# Altium PCB UAC.PcbDoc
Units mm, origin at the board's own origin, x right, y up, seen from the top; angles counter-clockwise.
Board outline 27.3 x 35.43 mm, 2 copper layers (Top Layer, Bottom Layer), stack 1.57 mm thick; 37 components, 26 nets, 187 pads, 40 vias.
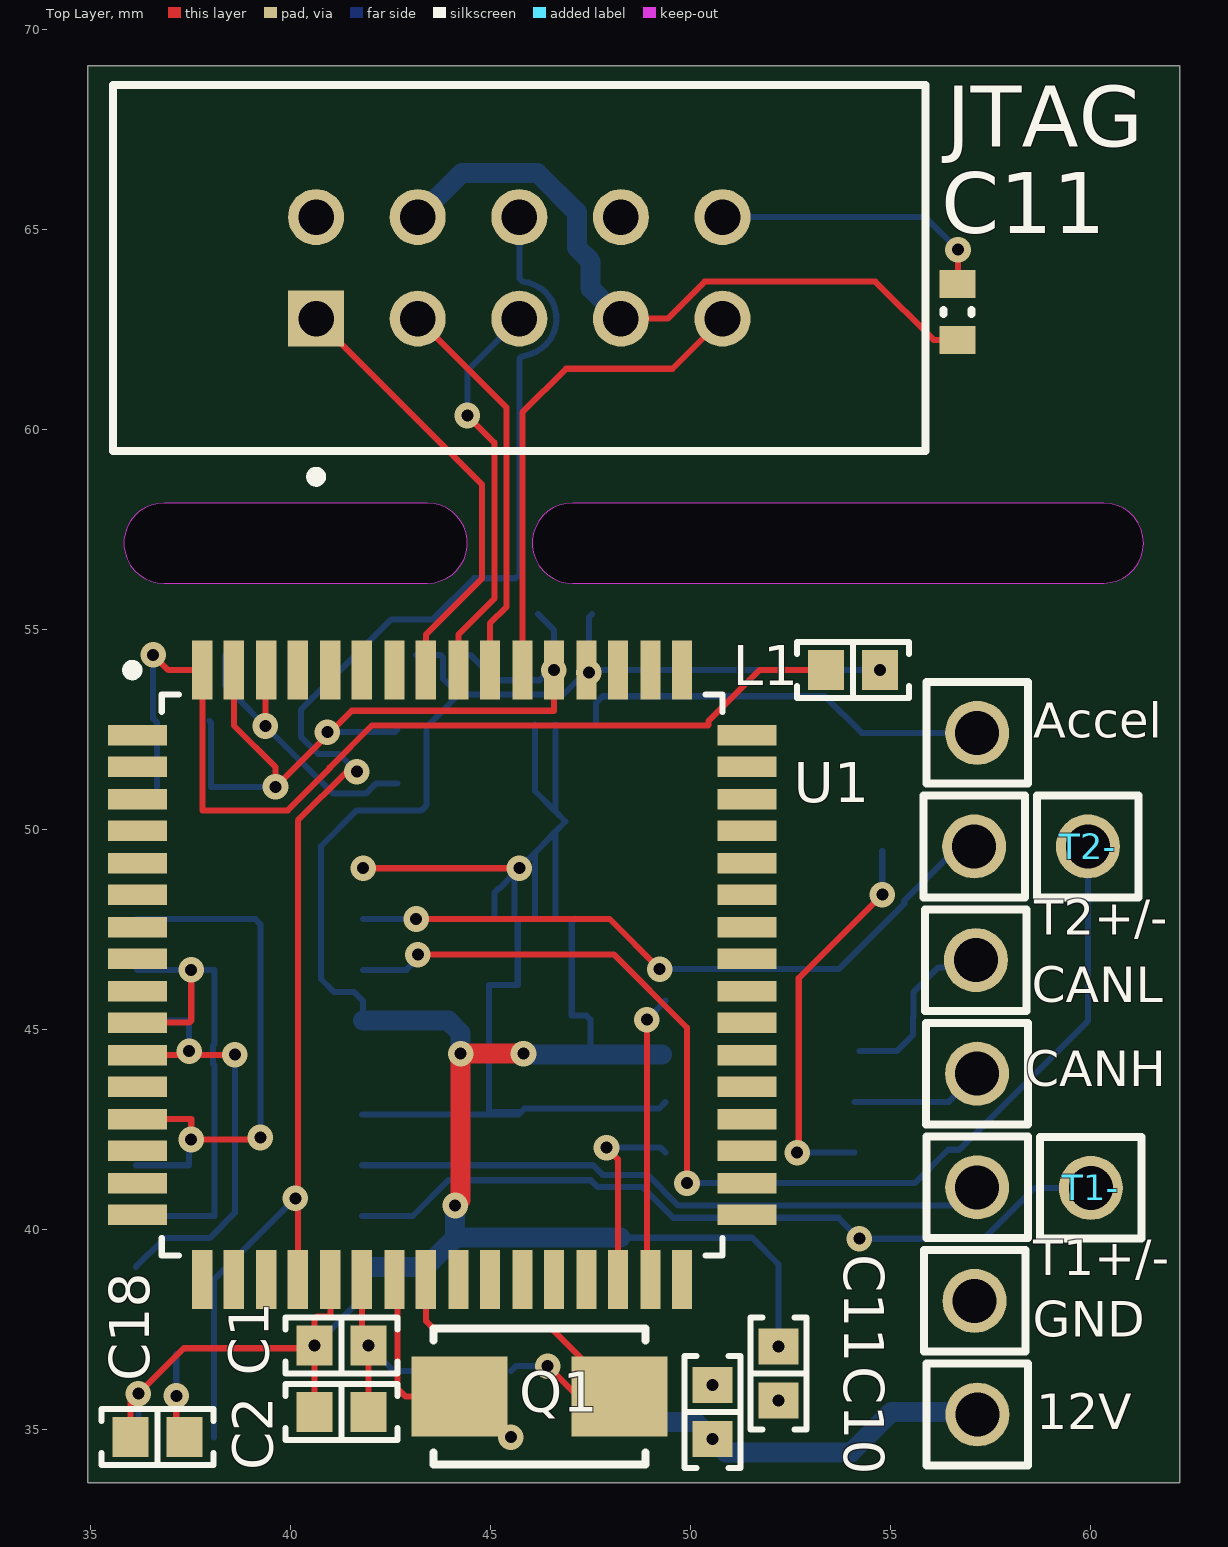
[diagram p0: Top Layer view]
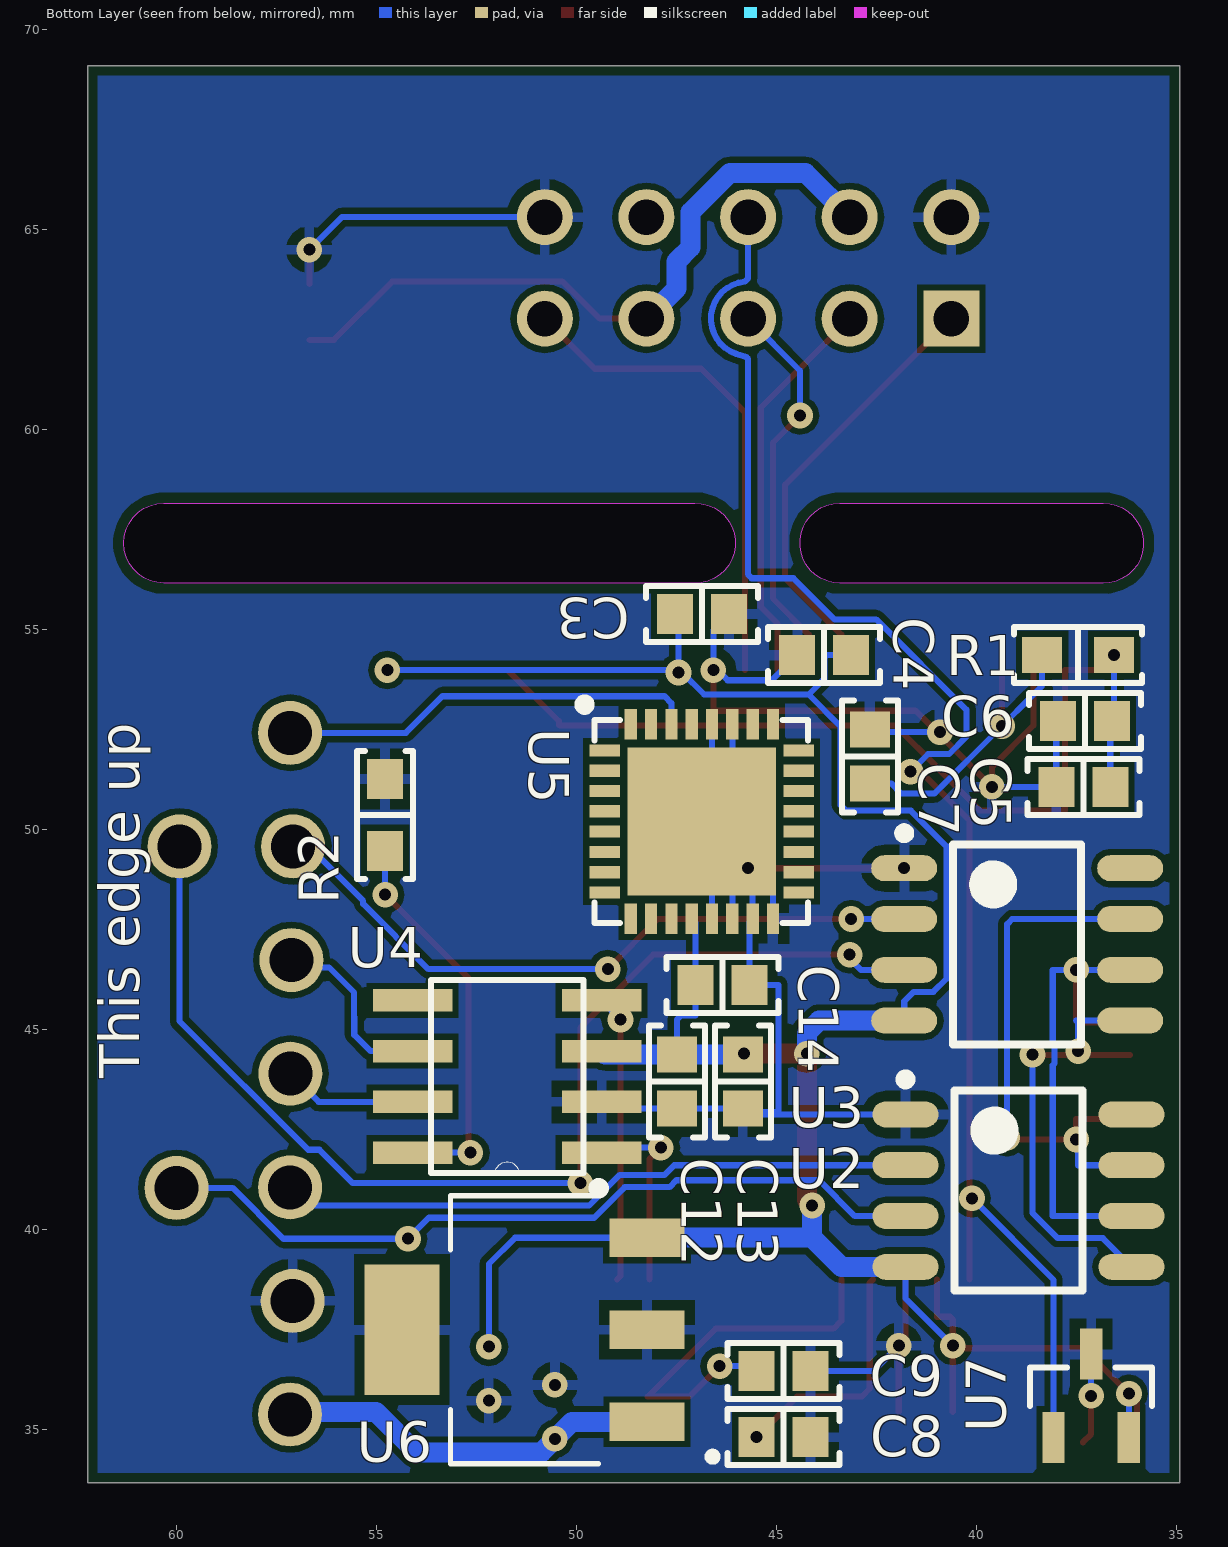
[diagram p1: Bottom Layer view, seen from below]

## Layer stack, top to bottom
Top Solder: solder mask 0.015, Solder Resist, Dk 3.5
Top Layer: signal copper 0.035
Dielectric 1: dielectric 1.5, FR-4, Dk 4.8
Bottom Layer: signal copper 0.035
Bottom Solder: solder mask 0.015, Solder Resist, Dk 3.5

## Board outline
34.925,33.655 34.925,69.088 62.23,69.088 62.23,33.655
cut-out: 36.838,56.15 43.422,56.15 ccw(c43.422,57.15) 43.422,58.15 36.842,58.15 ccw(c36.83,57.15)
cut-out: 47.049,56.15 60.325,56.15 ccw(c60.325,57.15) 60.325,58.15 52.246,58.151 47.049,58.152 ccw(c47.039,57.151)
cut-out: 0,0 0.254,0 0.254,0.254 0,0.254

## Design rules (kind name [scope] priority, off if disabled: settings)
AcuteAngle [All] p1: minimum=4.50000000000000E+0001 checktracksonly=FALSE
BoardOutlineClearance [All] p1: gap=0.254 ignorepadtopadclearanceinfootprint=FALSE
Clearance [All] p1: gap=0.152 ignorepadtopadclearanceinfootprint=FALSE
ComponentClearance [All] p1: gap=0.1 collisioncheckmode=3 verticalgap=0.254 showdistances=FALSE
FanoutControl Fanout_Small [All] p1 off: bgadir=Out bgaviamode=Centered fanoutstyle=Auto fanoutdirection=Alternating viagrid=0.025 // Protel DXP Scope 1 Expression Was: (CompPinCount < 5)   Fanout_Small (Default Rule)
FanoutControl Fanout_Default [All] p2: bgadir=Out bgaviamode=Centered fanoutstyle=Auto fanoutdirection=Alternating viagrid=0.025 // Fanout_Default (Default Rule)
FanoutControl Fanout_SOIC [All] p3 off: bgadir=Out bgaviamode=Centered fanoutstyle=Auto fanoutdirection=Alternating viagrid=0.025 // Protel DXP Scope 1 Expression Was: IsSOIC   Fanout_SOIC (Default Rule)
FanoutControl Fanout_BGA [All] p4 off: bgadir=Out bgaviamode=Centered fanoutstyle=Auto fanoutdirection=Alternating viagrid=0.025 // Protel DXP Scope 1 Expression Was: IsBGA   Fanout_BGA (Default Rule)
FanoutControl Fanout_LCC [All] p5 off: bgadir=Out bgaviamode=Centered fanoutstyle=Auto fanoutdirection=Alternating viagrid=0.025 // Protel DXP Scope 1 Expression Was: IsLCC   Fanout_LCC (Default Rule)
HoleSize [All] p1: absolutevalues=TRUE maxlimit=7 minlimit=0.2 maxpercent=80.000 minpercent=20.000
MinimumAnnularRing [All] p1: minimumring=0.17
PolygonConnect [All] p1: connectstyle=Relief reliefconductorwidth=0.254 reliefentries=4 polygonreliefangle="90 Angle" airgapwidth=0.254
RoutingVias [All] p1: holewidth=0.3 width=0.64 viastyle="Through Hole" minholewidth=0.3 minwidth=0.61 maxholewidth=0.711 maxwidth=1.27
SMDEntry [All] p1 off: side=TRUE corner=TRUE anyangle=FALSE // Protel DXP Scope 1 Expression Was: not IsRoundPad
SMDToCorner [All] p1: distance=60000
SilkToSolderMaskClearance [All] p1 off: minsilkscreentomaskgap=0.254 clearancetoexposedcopper=TRUE // Protel DXP Scope 1 Expression Was: IsPad
SolderMaskExpansion [All] p1: expansion=0 istentingtop=FALSE
Width [All] p1: maxlimit=1.219 minlimit=0.152 preferedwidth=0.305
22 further rules are at their usual default settings.

## Components (designator, comment, footprint, x,y, rotation, side; value= is the part's Value field where it differs from the comment)
12V "61300111121" 61300111121 57.169,35.365 r0 top
Accel "61300111121" 61300111121 57.165,52.406 r90 top
C1 "SMD Capacitor" "CAP 0603/1608" 41.275,37.084 r180 top value=1uF
C2 "SMD Capacitor" "CAP 0603/1608" 41.275,35.433 r180 top value=100nF
C3 "SMD Capacitor" "CAP 0603/1608" 46.865,55.375 r0 bottom value=1uF
C4 "SMD Capacitor" "CAP 0603/1608" 43.815,54.355 r180 bottom value=100nF
C5 "SMD Capacitor" "CAP 0603/1608" 37.338,51.054 r0 bottom value=1uF
C6 "SMD Capacitor" "CAP 0603/1608" 37.298,52.704 r0 bottom value=100nF
C7 "SMD Capacitor" "CAP 0603/1608" 42.672,51.816 r90 bottom value=1uF
C8 "SMD Capacitor" "CAP 0603/1608" 44.831,34.798 r0 bottom value=18pF
C9 "SMD Capacitor" "CAP 0603/1608" 44.831,36.449 r0 bottom value=18pF
C10 "SMD Capacitor" "CAP 0603/1608" 50.546,35.433 r270 top value=2u2
C11 "100nF 0603" CAPC0603(1608)100_L 56.678,62.93 r90 top value=100nF (schematic designator C?)
C11 "SMD Capacitor" "CAP 0603/1608" 52.197,36.384 r90 top value=1uF
C12 "SMD Capacitor" "CAP 0603/1608" 47.498,43.688 r90 bottom value=100nF
C13 "SMD Capacitor" "CAP 0603/1608" 45.847,43.688 r90 bottom value=1uF
C14 "SMD Capacitor" "CAP 0603/1608" 46.355,46.101 r180 bottom value=1uF
C18 "SMD Capacitor" "CAP 0603/1608" 36.679,34.799 r0 top value=1uF
CANH "61300111121" 61300111121 57.161,43.885 r90 top
CANL "61300111121" 61300111121 57.133,46.726 r90 top
GND "61300111121" 61300111121 57.101,38.205 r0 top
JTAG "5103309-1" TECO-5103309-1_V 45.718,64.03 r180 top (schematic designator JTAG?)
L1 "SMD Capacitor" "CAP 0603/1608" 54.062,53.975 r0 top value=100nH
Q1 "16M" "NDK NX5032GA" 46.228,35.814 r180 top
R1 "SMD Resistor" "STACKPOLE CSR0603" 37.465,54.355 r180 bottom value=100
R2 "SMD Resistor" "STACKPOLE CSR0603" 54.793,50.354 r270 bottom value=10k
T1+/- "61300111121" 61300111121 57.165,41.045 r0 top (schematic designator T1+)
T1- "61300111121" 61300111121 60.006,41.029 r0 top
T2+/- "61300111121" 61300111121 57.091,49.566 r0 top (schematic designator T2+)
T2- "61300111121" 61300111121 59.932,49.566 r0 top
U1 "AT90CAN128-16AI" *QFP80P1600X1600X120-64N 43.79,46.355 r0 top
U2 "MAX31855KASA+" SOIC8 38.958,40.962 r180 bottom value=Value
U3 "MAX31855KASA+" SOIC8 38.989,47.117 r180 bottom value=Value
U4 "MCP2551-I/SN" *SOIC127P600X175-8N 51.74,43.815 r0 bottom
U5 "ADXL1001/2" PCBComponent_1 49.299,51.968 r180 bottom
U6 "LT1118CST-5" *SOT230P700X180-4N 51.308,37.484 r0 bottom
U7 "MCP130T-450I/TT" *SOT95P237X112-3N 37.142,35.833 r180 bottom

## Footprints (in the part's own frame and the unit in brackets; to place one, negate y for a bottom-side part, rotate by r counter-clockwise, add the part's x,y. Pads: shape width x height; smd on the part's side, far side on the other; paste and mask are expansions set on the pad)
61300111121 [mm] "1pins, 1 row, straight, gold plating"
  round 1.6 hole 1.1: 1(0,0)
  silkscreen extent -1.27,-1.27 1.27,1.27, body extent -1.27,-1.27 1.27,1.27, height 8.57
*QFP80P1600X1600X120-64N [mil]
  rect 58x20 smd: 1(-300,236) 2(-300,205) 3(-300,173) 4(-300,142) 5(-300,110) 6(-300,79) 7(-300,47) 8(-300,16) 9(-300,-16) 10(-300,-47) 11(-300,-79) 12(-300,-110) 13(-300,-142) 14(-300,-173) 15(-300,-205) 16(-300,-236) 33(300,-236) 34(300,-205) 35(300,-173) 36(300,-142) 37(300,-110) 38(300,-79) 39(300,-47) 40(300,-16) 41(300,16) 42(300,47) 43(300,79) 44(300,110) 45(300,142) 46(300,173) 47(300,205) 48(300,236)
  rect 20x58 smd: 17(-236,-300) 18(-205,-300) 19(-173,-300) 20(-142,-300) 21(-110,-300) 22(-79,-300) 23(-47,-300) 24(-16,-300) 25(16,-300) 26(47,-300) 27(79,-300) 28(110,-300) 29(142,-300) 30(173,-300) 31(205,-300) 32(236,-300) 49(236,300) 50(205,300) 51(173,300) 52(142,300) 53(110,300) 54(79,300) 55(47,300) 56(16,300) 57(-16,300) 58(-47,300) 59(-79,300) 60(-110,300) 61(-142,300) 62(-173,300) 63(-205,300) 64(-236,300)
  silkscreen extent -310,-276 276,305, body extent -270,-270 270,270, height 30
*SOIC127P600X175-8N [mil]
  rect 78x22 smd: 1(-93,75) 2(-93,25) 3(-93,-25) 4(-93,-75) 5(93,-75) 6(93,-25) 7(93,25) 8(93,75)
  silkscreen extent -95,-95 75,115, body extent -75,-95 75,95, height 80
*SOT95P237X112-3N [mil]
  rect 22x50 smd: 1(-37,-41) 2(37,-41) 3(0,41)
  silkscreen extent -60,-10 60,28, body extent -60,-25 60,25, height 50
*SOT230P700X180-4N [mm]
  rect 1.88x0.96 smd: 1(-3.065,2.3) 2(-3.065,0) 3(-3.065,-2.3)
  rect 1.88x3.26 smd: 2(3.065,0)
  silkscreen extent -4.8,-3.35 1.85,3.35, body extent -1.91,-3.43 1.91,3.43, height 1.27
"CAP 0603/1608" [mm] "Chip Capacitor, 2-Leads, Body 1.60x0.80mm, IPC Medium Density"
  rect 0.9x1 smd: 1(-0.675,0) 2(0.675,0)
  silkscreen extent -1.4,-0.7 1.4,0.7, body extent -0.8,-0.41 0.8,0.41, height 0.82
CAPC0603(1608)100_L [mm] "Chip Capacitor, Body 1.6x0.8mm, Height 1.0mm, IPC High Density"
  rect 0.7x0.9 smd: 1(-0.7,0) 2(0.7,0)
  silkscreen extent -0.05,-0.35 0.05,0.35, body extent -0.87,-0.47 0.88,0.48, height 1
"NDK NX5032GA" [mm] "Crystal, 2-Leads, Body 5.00x3.20mm, IPC Medium Density"
  rect 2.4x2 smd: 1(-2,0) 2(2,0)
  silkscreen extent -2.65,-1.7 2.65,1.7, body extent -2.5,-1.6 2.5,1.6, height 1.2
PCBComponent_1 [mil]
  rect 30x12 smd: 1(0,0) 2(0,-20) 3(0,-40) 4(0,-60) 5(0,-80) 6(0,-100) 7(0,-120) 8(0,-140) 17(191,-140) 18(191,-120) 19(191,-100) 20(191,-80) 21(191,-60) 22(191,-40) 23(191,-20) 24(191,0)
  rect 12x30 smd: 9(25.5,-165.5) 10(45.5,-165.5) 11(65.5,-165.5) 12(85.5,-165.5) 13(105.5,-165.5) 13(105.5,25.5) 13(125.5,-165.5) 13(125.5,25.5) 15(145.5,-165.5) 16(165.5,-165.5) 25(165.5,25.5) 26(145.5,25.5) 29(85.5,25.5) 30(65.5,25.5) 31(45.5,25.5) 32(25.5,25.5)
  rect 146x146 smd: 13(95.5,-70)
  silkscreen extent -25,-170 200,50, body extent -10,-167 198,35, height 10
SOIC8 [mm] "SOIC, 8-Leads, Body 4,90x3,90mm, Pitch 1,27mm, IPC Low Density"
  oval 1.65x0.65 smd: 1(-2.825,1.905) 2(-2.825,0.635) 3(-2.825,-0.635) 4(-2.825,-1.905) 5(2.825,-1.905) 6(2.825,-0.635) 7(2.825,0.635) 8(2.825,1.905)
  silkscreen extent -2.95,-2.5 1.6,2.9, body extent -3,-2.5 3,2.5, height 1.75
"STACKPOLE CSR0603" [mm] "Chip Resistor, 2-Leads, Body 1.60x0.80mm, IPC Medium Density"
  rect 1x0.9 smd: 1(-0.9,0) 2(0.9,0)
  silkscreen extent -1.6,-0.7 1.6,0.7, body extent -0.85,-0.4 0.85,0.4, height 0.45
TECO-5103309-1_V [mm] "Male Header, 10-Leads, Body 20.32x9.144mm, Pitch 2.54mm"
  rect 1.4x1.4 hole 0.889: 1(5.08,1.27)
  round 1.4 hole 0.889: 2(5.08,-1.27) 3(2.54,1.27) 4(2.54,-1.27) 5(0,1.27) 6(0,-1.27) 7(-2.54,1.27) 8(-2.54,-1.27) 9(-5.08,1.27) 10(-5.08,-1.27)
  silkscreen extent -10.16,-4.57 10.16,5.35, body extent -10.16,-4.57 10.16,4.57, height 9.85

## Part data
12V Accel CANH CANL GND T1+/- T1- T2+/- T2-: "WR-PHD 2.54 mm THT Pin Header, 1p", Rated Current="3 A", Withstanding Voltage="500 VAC", Working Voltage="250 VAC", ComponentLink1Description=Manufacturer, ComponentLink1URL=http://www.we-online.de, ComponentLink2Description=Datasheet, ComponentLink2URL=http://katalog.we-online.de/em/datasheet/6130xx11121.pdf, Part Number=61300111121, Pin Number=1, Pitch="2.54 mm", Published Date="Aug 2017", Publisher="Wurth Elektronik"
C1 C2 C3 C4 C5 C6 C7 C8 C9 C10 C11 C12 C13 C14 C18 L1: "Capacitor with multiple Footprints"
C11: library part CMP-1035-02579-1, "CAP 100nF 10V ±5% 0603 (1608 Metric) Thickness 1mm SMD", Case-EIA=0603, Case-Metric=1608, Rated Voltage="10 V", Tolerance=Â±5%, Max Thickness="1 mm", Technology=SMT
JTAG: library part CMP-2000-07502-1, "Male Header, Pitch 2.54 mm, 2 x 5 Position, Height 9.855 mm, Tail Length 3.048 mm, -65 to 105 degC, RoHS, Tube", Colour=Black, Current Rating=1A, Flammability Rating=UL94V-0, Insulation Resistance=5GR, Manufacturer="TE Connectivity", Max Operating Temperature=105degC, Min Operating Temperature=-65degC, Package Description="Male Header, Pitch 2.54 mm, 2 x 5 Position, Height 9.855 mm, Tail Length 3.048 mm", Package Quantity=35, Board Standoff=Yes(With), Body Material=Thermoplastic, Connector System=Wire-to-Board, Connector Type=Header, Contact Gender=Male, Contact Material=CopperAlloy, Contact Mating Length=0.24inch, Contact Plating=Gold, Contact Shape=Square, Datasheet URL=http://www.te.com/commerce/DocumentDelivery/DDEController?Action=showdoc&DocId=Customer+Drawing%7F5103309%7FE1%7Fpdf%7FEnglish%7FENG_CD_5103309_E1.pdf%7F5103309-1, Datasheet Version="Rev. E1, 03/2011", Depth=9.14mm, ELV=Compliant, Gender=Male, Height=8.813mm, Housing Colour=Black, Housing Material=PBT, Lead Free=LeadFree, Length=0.8inch, Manufacturer URL=http://www.te.com/, Mating Alignment=Yes(With), Mating Connector Lock=No(Without), Mating Retention=No(Without), Max Current Rating=1A, Mount=ThroughHole, Mounting Technology=ThroughHole, Number of Contacts=10, Number of Positions=10, Number of Rows=2, Orientation=Straight, Package Reference=5103309-1, Packaging=Rail/Tube, Panel Mount Retention=No(Without), PCB Mount Alignment=No(Without), PCB Mount Retention=Without, PCB Mounting Orientation=Vertical, Pitch=2.54mm, REACH SVHC=NoSVHC, RoHSCompliant=True, Row Spacing=2.54mm, Shrouded=Yes(With), Shrouded End Dimension=3.81mm, Termination=ThroughHole, Termination Post Length=0.12inch
Q1: library part "16 MHz Quartz", "16 MHz Quartz"
R1 R2: "Resistor with multiple footprints"
U1: "Ic Mcu 8bit 128kb Flash 64tqfp", Package="TQFP-64 Microchip", Availability=Unavailable, MF=Microchip, MP=AT90CAN128-16AI, Price=None, SnapEDA_Link=https://www.snapeda.com/parts/AT90CAN128-16AI/Microchip/view-part/?ref=snap
U2 U3: "No Description Available", Built_By=EMA_UL_Team, Copyright="Copyright (C) 2018 Accelerated Designs. All rights reserved", Manufacturer_Part_Number=MAX31855KASA+, RefDes=RefDes, Type=DEV, Vendor="Maxim Integrated Products"
U4: "MCP2551 Series 5.5 V 1 Mb/s Surface Mount High-Speed CAN Transceiver - SOIC-8", Package="SOIC-8 Microchip", Availability=Unavailable, MF=Microchip, MP=MCP2551-I/SN, Price=None, SnapEDA_Link=https://www.snapeda.com/parts/MCP2551-I/SN/Microchip/view-part/?ref=snap
U6: "or UA78M if used topdown (in and out changed)"
U7: "System Supervisors - Power Supply Monitors with Reset Generators Open Drain Low", Package="SOT-23-3 Microchip", Availability=Unavailable, MF=Microchip, MP=MCP120T-450I/TT, Price=None, SnapEDA_Link=https://www.snapeda.com/parts/MCP120T-450I/TT/Microchip/view-part/?ref=snap

## Via types
v1: diameter 0.64, hole 0.3, Top Layer to Bottom Layer, 40 vias

## Nets (pads, with @x,y where several pads share a name; then routed paths per layer and width w, separated by ;. In a path a pad name is that pad's centre, name@x,y a point inside that pad or via, vN(x,y) a via of type N, cw(c..) or ccw(c..) an arc to the next point about the centre after c; other vN are vias at no path point)
+5V: C1.2 C2.2 C3.2 C4.2 C11.2@52.197,37.059 C12.2 C13.2 C14.1 C18.1 L1.2 U1.21 U1.52 U2.4 U3.4 U4.3 U5.12 U6.3 U7.2 | length 68.6
  Top Layer w0.152: C18.1@35.997,34.671 35.997,35.686 v1(36.195,35.884) 37.332,37.021 40.537,37.021 v1(40.6,37.084) ; C2.2 v1(40.6,37.084) ; U1.21 40.996,37.809 40.665,37.809 40.6,37.744 v1(40.6,37.084) ; U1.52 v1(47.457,53.914)
  Top Layer w0.5: v1(44.113,40.589) 44.25,40.726 v1(44.25,44.387) v1(45.823,44.387)
  Bottom Layer w0.152: v1(36.195,35.884) 36.195,34.799 U7.2 ; v1(40.6,37.084) 41.783,38.267 U2.4 ; U3.4 41.814,45.696 41.581,45.928 41.085,45.928 40.76,46.253 40.76,49.576 41.647,50.462 43.267,50.462 43.401,50.596 43.401,52.56 44.206,53.365 ; C4.2 43.742,54.354 43.811,54.286 43.811,53.76 44.206,53.365 ; v1(45.823,44.387) C13.2 ; U5.12 47.03,47.668 C14.1 47.03,45.339 47.396,45.339 47.498,45.237 C12.2 ; C3.2 47.457,55.292 v1@47.457,53.959 ; U6.3 51.54,39.784 52.197,39.127 v1(52.197,37.059) ; U4.3@49.291,44.363 U4.3 ; v1(54.737,53.975) 47.474,53.975 v1@47.457,53.959 ; 44.206,53.365 46.813,53.365 47.362,53.914 v1(47.457,53.914) v1@47.457,53.959
  Bottom Layer w0.5: U2.4 43.386,39.057 44.113,39.784 ; U3.4 43.942,45.212 44.25,44.904 v1(44.25,44.387) ; v1(44.113,40.589) 44.113,39.784 ; C13.2 C12.2 ; C12.2 U4.3@49.291,44.363 ; U6.3 44.113,39.784
+12V: 12V.1 C10.2 U6.1 | length 9.7
  Bottom Layer w0.152: U6.1 U6.1@48.248,35.179
  Bottom Layer w0.5: U6.1@48.248,35.179 50.125,35.179 v1(50.546,34.758) 50.887,34.417 54.008,34.417 55.024,35.433 57.101,35.433 12V.1
GND: C1.1 C2.1 C3.1 C4.1 C5.2 C6.2 C7.2 C8.1 C9.1 C10.1 C11.1@52.197,35.709 C11.2@56.678,63.63 C12.1 C13.1 C14.2 C18.2 GND.1 JTAG.2 JTAG.10 R2.1 U1.22 U1.53 U1.63 U2.1 U3.1 U4.2 U5.13 U5.15 U5.16 U6.2 U7.3 | length 67.4
  Top Layer w0.152: v1(37.142,35.833) 37.142,34.876 C18.2@37.347,34.671 ; U1.63 38.583,52.59 39.624,51.548 v1(39.624,51.054) 41.529,52.959 46.584,52.959 v1(46.584,53.975) ; U1.22 41.783,37.251 v1(41.95,37.084) C2.1 ; v1(41.814,49.022) v1(45.72,49.022) ; C11.2@56.678,63.63 56.686,63.637 v1(56.686,64.487)
  Bottom Layer w0.152: v1(37.142,35.833) U7.3 ; C6.2 38.013,52.664 C5.2 v1(39.624,51.054) ; v1(40.919,52.426) 42.607,52.426 C7.2 ; U2.1 45.701,42.867 C13.1@45.76,42.926 ; v1(41.95,37.084) 42.585,36.449 C9.1 ; C4.1 45.123,53.721 46.228,53.721 46.482,53.975 v1(46.584,53.975) 46.584,54.982 C3.1 ; U5.16 45.095,48.412 45.197,48.514 45.212,48.514 U5.13@45.603,48.905 ; U5.15 U5.13@45.603,48.905 ; U5.15@45.68,47.694 C14.2 44.958,46.101 44.958,42.926 C13.1@45.76,42.926 ; U5.13@46.111,47.765 U5.13@46.111,49.413 ; U5.13@46.111,52.616 46.111,50.952 U5.13@46.619,50.444 ; U5.13@46.619,47.765 U5.13@46.619,49.936 ; U5.13@46.619,52.616 U5.13@46.619,50.444 ; U4.2 49.211,43.013 C12.1 C13.1 C13.1@45.76,42.926 ; JTAG.10 55.872,65.3 v1(56.686,64.487) ; U5.13@45.603,48.905 v1(45.72,49.022) U5.13@46.111,49.413 ; U5.13@46.111,49.413 46.482,49.784 46.474,49.792 U5.13@46.619,49.936 ; U5.13@46.619,49.936 46.873,50.19 U5.13@46.619,50.444
  other v1: 52.197,35.709 50.546,36.108
NetAccel_1: Accel.1 U5.30 | length 10.5
  Bottom Layer w0.152: U5.30 47.635,53.149 47.806,53.321 53.359,53.321 54.274,52.406 Accel.1
NetC7_1: C7.1 R1.1 U1.62 | length 7.7
  Top Layer w0.152: v1(39.37,52.578) 39.37,53.95 U1.62
  Bottom Layer w0.152: R1.1 38.365,53.586 38.652,53.299 38.652,53.296 v1(39.37,52.578) 41.062,50.886 41.883,50.886 42.138,51.141 C7.1
NetC8_2: C8.2 Q1.2 U1.23 | length 6.1
  Top Layer w0.152: U1.23 42.675,38.656 42.675,36.015 42.876,35.814 Q1.2 44.49,35.814 v1(45.506,34.798) v1@45.536,34.768
NetC9_2: C9.2 Q1.1 U1.24 | length 9.7
  Top Layer w0.152: U1.24 43.383,37.708 43.577,37.514 46.528,37.514 Q1.1 47.19,35.814 v1(46.428,36.576)
  Bottom Layer w0.152: C9.2 45.633,36.576 v1(46.428,36.576)
NetCANH_1: CANH.1 U4.7 | length 3.4
  Bottom Layer w0.152: U4.7 56.456,43.18 CANH.1
NetCANL_1: CANL.1 U4.6 | length 4.5
  Bottom Layer w0.152: U4.6@54.221,44.45 55.156,44.45 55.563,44.857 55.563,45.295 55.569,45.301 55.569,45.917 56.194,46.542 56.95,46.542 CANL.1
NetJTAG?_1: JTAG.1 U1.57 | length 11.1
  Top Layer w0.152: JTAG.1 44.79,58.608 44.79,56.271 43.383,54.864 U1.57
NetJTAG?_3: JTAG.3 U1.55 | length 9.9
  Top Layer w0.152: JTAG.3 45.4,60.539 45.4,55.56 44.983,55.143 U1.55
NetJTAG?_5: JTAG.5 U1.56 | length 10
  Top Layer w0.152: U1.56 44.196,54.864 45.095,55.763 45.095,59.664 v1(44.42,60.339)
  Bottom Layer w0.152: v1(44.42,60.339) 44.42,61.462 JTAG.5
NetJTAG?_6: JTAG.6 U1.20 U7.1 | length 39.5
  Top Layer w0.152: v1(40.118,40.767) v1@40.183,40.767 ; U1.20 v1@40.183,40.767 ; v1(41.656,51.435) 41.402,51.435 40.183,50.216 v1@40.183,40.767
  Bottom Layer w0.152: U7.1 38.082,38.73 v1(40.118,40.767) ; v1(41.656,51.435) 41.214,51.877 40.692,51.877 40.259,52.31 40.259,52.986 42.518,55.245 43.558,55.245 44.585,56.272 45.629,56.272 45.718,56.361 45.718,61.753 45.762,61.798 cw(c45.87,61.69) 45.763,61.799 46.005,61.877 ccw(c45.718,62.76) 45.8,63.685 45.718,63.767 JTAG.6
NetJTAG?_9: JTAG.9 U1.54 | length 12.4
  Top Layer w0.152: U1.54 45.796,60.417 46.889,61.51 49.548,61.51 JTAG.9
NetR2_2: R2.2 U4.8 | length 10.3
  Top Layer w0.152: v1(52.662,41.91) 52.705,41.953 52.705,46.274 v1(54.793,48.362)
  Bottom Layer w0.152: v1(52.662,41.91) U4.8 ; 54.793,48.802 v1(54.793,48.362) R2.2
NetT1+_1: T1+/-.1 U2.2 | length 16
  Bottom Layer w0.152: U2.2 47.562,41.597 47.803,41.356 48.927,41.356 49.694,40.589 56.709,40.589 T1+/-.1
NetT1-_1: T1-.1 U2.3 | length 19.7
  Bottom Layer w0.152: U2.3 43.048,40.327 43.942,41.22 47.508,41.22 47.677,41.051 48.801,41.051 49.568,40.284 53.696,40.284 v1(54.221,39.759) 57.334,39.759 58.604,41.029 T1-.1
NetT2+_1: T2+/-.1 U3.2 | length 17.1
  Top Layer w0.152: v1(43.14,47.752) 47.974,47.752 v1(49.225,46.501)
  Bottom Layer w0.152: U3.2 v1(43.14,47.752) ; v1(49.225,46.501) 53.708,46.501 55.341,48.134 55.341,48.207 56.7,49.566 T2+/-.1
NetT2-_1: T2-.1 U3.3 | length 29.2
  Top Layer w0.152: v1(43.18,46.863) 48.087,46.863 49.911,45.039 v1(49.911,41.148)
  Bottom Layer w0.152: U3.3 42.896,46.482 43.154,46.74 43.154,46.975 43.18,46.949 v1(43.18,46.863) ; v1(49.911,41.148) 55.601,41.148 56.436,41.983 56.714,41.983 59.932,45.201 T2-.1
NetU1_10: U1.10 U2.6 U3.6 | length 12.7
  Top Layer w0.152: U1.10 37.465,45.161 37.516,45.212 v1(37.516,46.482)
  Bottom Layer w0.152: U2.6 38.1,40.327 38.1,44.095 38.059,44.136 38.059,44.59 38.1,44.631 38.1,46.482 v1(37.516,46.482) U3.6
NetU1_11: U1.11 U2.5 U3.5 | length 11.7
  Top Layer w0.152: U1.11 v1@37.465,44.348 ; v1(37.465,44.45) v1@37.465,44.348 ; v1(38.608,44.363) 38.593,44.348 v1@37.465,44.348
  Bottom Layer w0.152: U2.5 36.849,39.773 37.977,39.773 38.608,40.404 v1(38.608,44.363) ; U3.5 37.516,45.212 37.465,45.161 v1(37.465,44.45)
NetU1_13: U1.13 U2.7 U3.7 | length 14.1
  Top Layer w0.152: U1.13 37.516,42.748 v1(37.516,42.24) 39.192,42.24 v1(39.243,42.291)
  Bottom Layer w0.152: U2.7 37.465,41.597 37.465,42.189 v1(37.516,42.24) ; U3.7 39.116,47.752 39.243,47.625 v1(39.243,42.291)
NetU1_30: U1.30 U4.1 | length 5
  Top Layer w0.152: v1(47.898,42.037) 48.184,41.751 U1.30
  Bottom Layer w0.152: v1(47.898,42.037) 49.251,42.037 U4.1
NetU1_31: U1.31 U4.4 | length 7.2
  Top Layer w0.152: v1(48.908,45.237) 48.908,38.824 U1.31
  Bottom Layer w0.152: v1(48.908,45.237) 49.378,45.707 U4.4
VDD: C11.1@56.678,62.23 JTAG.4 JTAG.7 | length 17.4
  Top Layer w0.152: JTAG.7 49.425,62.76 50.353,63.689 54.617,63.689 56.076,62.23 C11.1@56.678,62.23
  Bottom Layer w0.5: JTAG.4 44.28,66.403 46.175,66.403 47.156,65.422 47.156,64.54 47.502,64.194 47.502,63.517 JTAG.7
VDDA: C5.1 C6.1 L1.1 R1.2 U1.64 | length 25.3
  Top Layer w0.152: v1(36.565,54.355) 36.945,53.975 U1.64 37.795,50.47 39.929,50.47 40.98,51.521 40.98,51.535 42.035,52.59 50.431,52.59 50.444,52.603 50.444,52.698 51.721,53.975 L1.1
  Bottom Layer w0.152: v1(36.565,54.355) 36.565,52.762 C6.1 36.663,52.664 C5.1
pads on no net: JTAG.8 U1.1 U1.2 U1.3 U1.4 U1.5 U1.6 U1.7 U1.8 U1.9 U1.12 U1.14 U1.15 U1.16 U1.17 U1.18 U1.19 U1.25 U1.26 U1.27 U1.28 U1.29 U1.32 U1.33 U1.34 U1.35 U1.36 U1.37 U1.38 U1.39 U1.40 U1.41 U1.42 U1.43 U1.44 U1.45 U1.46 U1.47 U1.48 U1.49 U1.50 U1.51 U1.58 U1.59 U1.60 U1.61 U2.8 U3.8 U4.5 U5.1 U5.2 U5.3 U5.4 U5.5 U5.6 U5.7 U5.8 U5.9 U5.10 U5.11 U5.17 U5.18 U5.19 U5.20 U5.21 U5.22 U5.23 U5.24 U5.25 U5.26 U5.29 U5.31 U5.32

## Polygon pours and split planes (outlines as drawn)
GND on Bottom Layer "GND_L02_P006" (solid, remove dead copper, pour order 6): 34.925,69.088 34.925,33.655 62.23,33.655 62.23,69.088

## Silkscreen, mask and mechanical layers (free items; w line width, h text height)
Bottom Overlay:
  text "This edge up" at 60.932,43.77 h1 r270
Board Outline:
  lines w0.15: 34.925,33.655 34.925,69.088 62.23,69.088 62.23,33.655 ; 36.839,56.143 cw(c36.838,57.152) 36.842,58.16 43.437,58.14 ; 36.839,56.15 43.434,56.15 ; 43.443,56.15 ccw(c43.434,57.147) 43.443,58.143 ; 46.999,58.132 ccw(c46.983,57.167) 47.06,56.206 ; 52.159,58.113 60.325,58.168 cw(c60.325,57.167) 60.325,56.167 52.224,56.188
  lines w0.152: 40.165,56.15 36.839,56.15 cw(c36.83,57.15) 36.842,58.15 40.165,58.15 ; 46.983,58.153 60.325,58.151 ; 47.06,56.206 60.325,56.15 ccw(c60.325,57.15) 60.325,58.15 ; 34.925,33.655 62.23,33.655 62.23,69.088 34.925,69.088 34.925,33.655
Drill Drawing:
  lines w0.15: 34.925,33.655 62.23,33.655